# Altium PCB DIO_RJ45_DIOT.PCBDOC (part 4 of 6)
Units mil, origin at the board's own origin, x right, y up, seen from the top; angles counter-clockwise.
Board outline 8758.72 x 3941.04 mil, 4 copper layers (TopLayer, MidLayer1, Internal Plane 1, BottomLayer), stack 46.562 mil thick; 318 components, 196 nets, 1276 pads, 687 vias.
Unrouted connection lines stored in the file: 2.
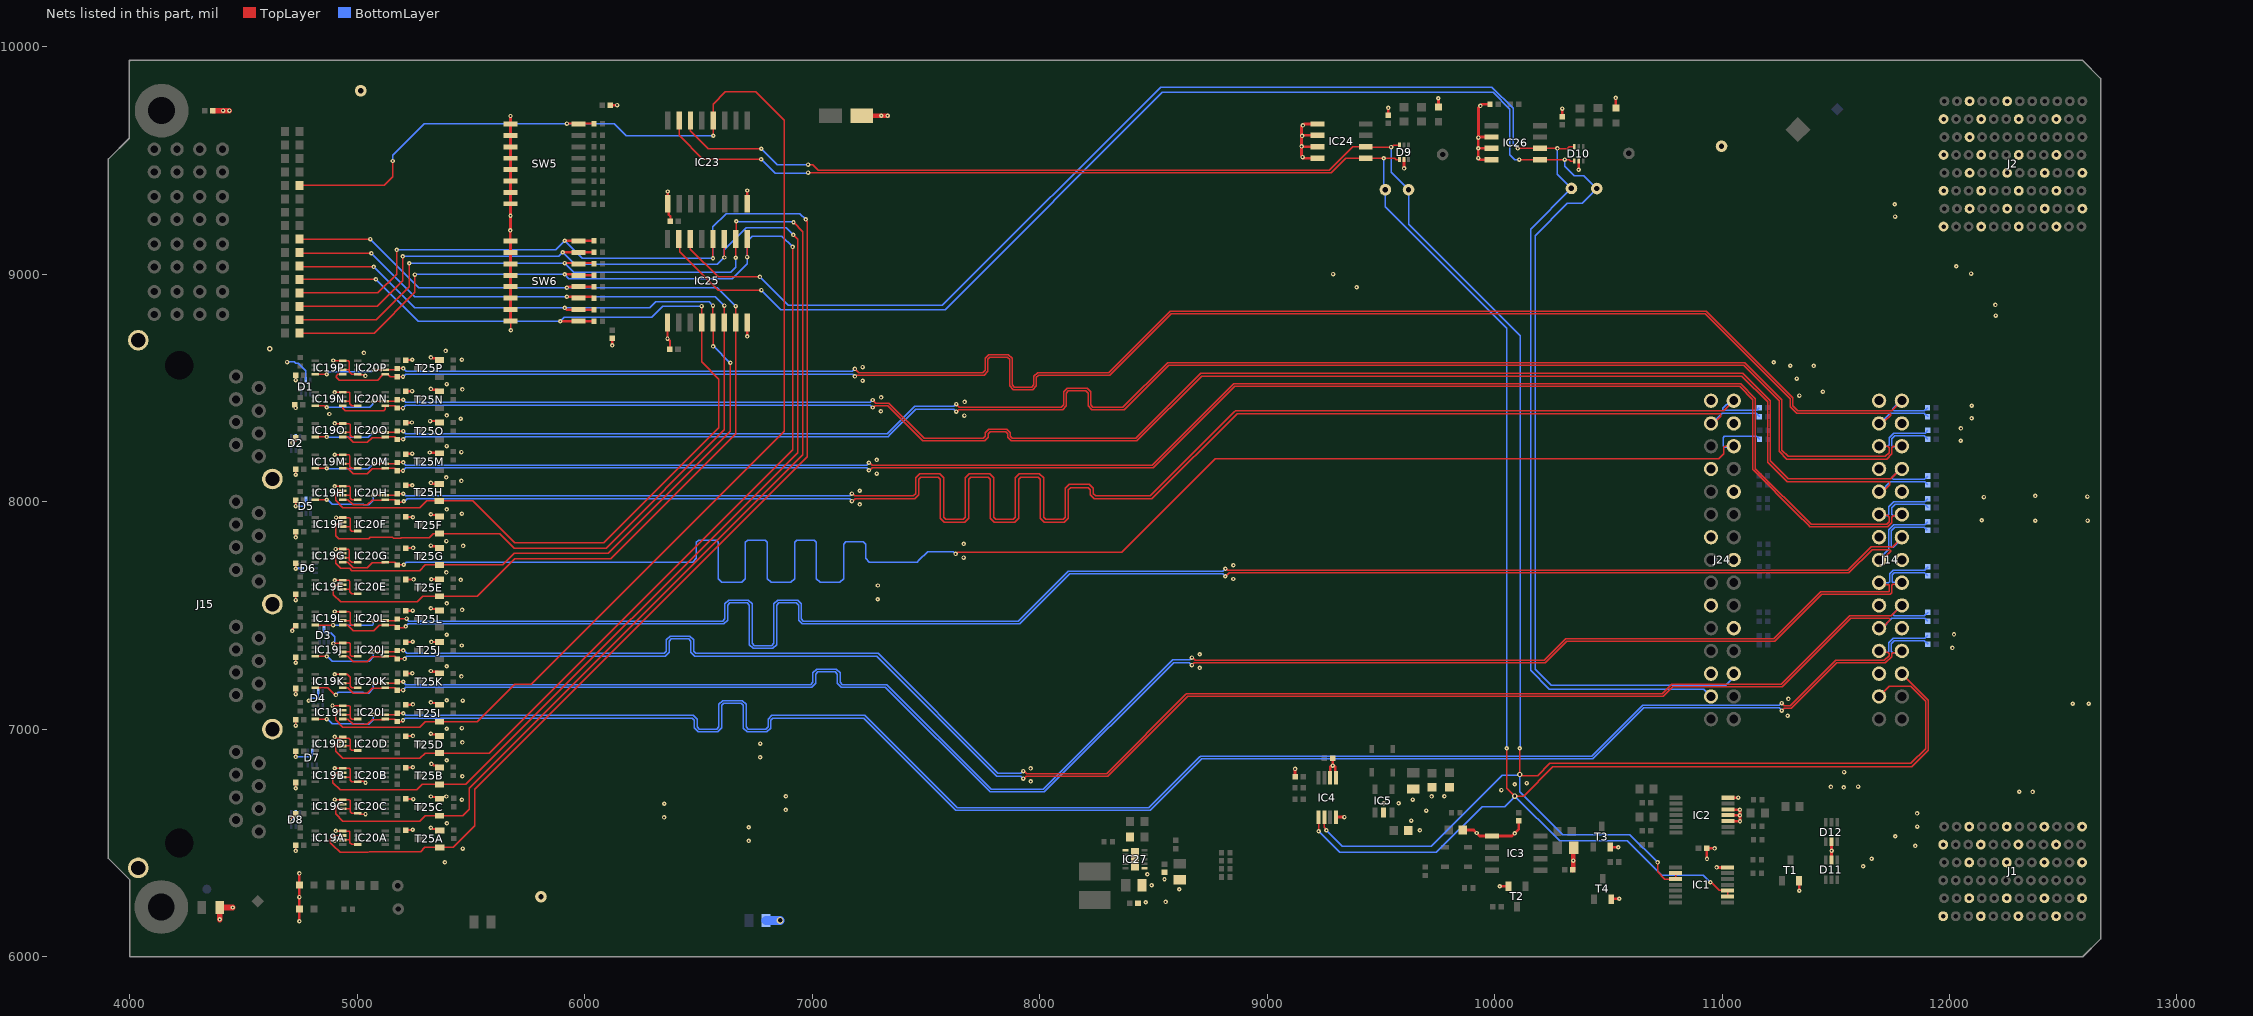
[diagram p5: the nets of this part, all layers, seen from the top]

## Via types
v1: diameter 19.68, hole 7.87, TopLayer to BottomLayer, tented both sides, 672 vias
v2: diameter 31.5, hole 19.68, TopLayer to BottomLayer, 10 vias
v3: diameter 23.62, hole 11.81, TopLayer to BottomLayer, tented both sides, 5 vias

## Nets (pads, with @x,y where several pads share a name; then routed paths per layer and width w, separated by ;. In a path a pad name is that pad's centre, name@x,y a point inside that pad or via, vN(x,y) a via of type N, cw(c..) or ccw(c..) an arc to the next point about the centre after c; other vN are vias at no path point) (continued)
DIR_CTRL7: IC19I.3 IC23.12 R95.2 R104.1 SW5.8 T25I.1 | length 6614.6
  TopLayer w6: R95.2@4746.06,9389.76 5119.09,9389.76 5156.5,9427.17 v1(5156.5,9497.05) ; IC19I.3@4937.15,7083.06 4921.47,7083.06 4905.13,7066.72 4905.13,7040.35 4937.1,7008.38 5275.28,7008.38 5299.13,7032.23 T25I.1@5362.05,7032.23 5527.31,7032.23 5691.93,7196.85 5765.75,7196.85 6876.97,8308.07 6876.97,9676.18 6751.97,9801.18 6619.09,9801.18 6565.35,9747.44 IC23.12@6565.35,9675.2 v1@6565.35,9607.87
  TopLayer w10: v1(5922.24,9661.42) 5971.26,9661.42 SW5.8@5973.42,9659.25 5975.59,9661.42 R104.1@6041.53,9661.42
  BottomLayer w6: v1(5156.5,9497.05) 5155.51,9498.03 5155.51,9522.64 5294.29,9661.42 5899.6,9661.42 v1(5922.24,9661.42) 6130.91,9661.42 6183.96,9608.37 v1(6565.85,9608.37)
DIR_CTRL8: IC19H.3 IC25.4 R106.1 R113.2 SW6.1 T25H.1 | length 4650.1
  TopLayer w6: R113.2@4746.06,8976.38 4747.05,8977.36 v1(5082.68,8977.36) ; IC19H.3@4937.15,8047.63 4921.47,8047.63 4905.13,8031.29 4905.13,8004.92 4937.1,7972.94 5275.28,7972.94 5305.29,8002.95 T25H.1@5360.24,8002.95 5507.87,8002.95 5691.93,7818.9 6084.82,7818.9 6590.55,8324.63 6590.55,8537.4 6514.37,8613.58 IC25.4@6514.37,8787.4 v1(6514.37,8859.25)
  TopLayer w10: v1(5892.72,8792.32) R106.1@6041.53,8792.32
  BottomLayer w6: v1(5082.68,8977.36) 5267.72,8792.32 v1(5892.72,8792.32) 5911.56,8811.17 6295.42,8811.17 6343.5,8859.25 v1(6514.37,8859.25)
DIR_CTRL9: IC19G.3 IC25.5 R108.1 R115.2 SW6.2 T25G.1 | length 4701.5
  TopLayer w6: R115.2@4759.84,9035.43 4759.84,9032.43 4760.78,9031.5 v1(5072.83,9031.5) ; IC19G.3@4937.15,7772.04 4921.47,7772.04 4905.13,7755.7 4905.13,7729.33 4928.26,7706.2 4967.03,7706.2 4976.38,7696.85 5274.78,7696.85 5299.13,7721.2 T25G.1@5362.05,7721.2 5639.51,7721.21 5689.96,7771.65 6104.39,7771.65 6640.75,8308.01 v1(6640.75,8610.24) ; v1(6564.37,8861.22) IC25.5@6564.37,8787.4 6564.96,8786.81 v1(6564.96,8682.09)
  TopLayer w10: R115.2@4746.06,9035.43 R115.2@4759.84,9035.43 ; v1(5912.4,8851.38) 5920.84,8842.94 R108.1@6041.53,8842.94
  BottomLayer w6: v1(5072.83,9031.5) 5252.95,8851.38 v1(5912.4,8851.38) 6286.42,8851.38 6313.13,8878.09 6547.5,8878.09 v1(6564.37,8861.22) ; v1(6564.96,8682.09) 6566.93,8682.09 6638.78,8610.24 v1(6640.75,8610.24)
DIR_CTRL10: IC19F.3 IC25.6 R110.1 R117.2 SW6.3 T25F.1 | length 4679.1
  TopLayer w6: R117.2@4746.06,9094.49 4749.02,9091.54 v1(5062.99,9091.54) ; IC19F.3@4937.15,7909.83 4921.47,7909.83 4905.13,7893.49 4905.13,7848.81 4918.31,7835.63 5050.38,7835.63 5058.74,7843.99 5155.27,7843.99 5160.19,7839.07 5192.06,7839.07 5194.23,7841.24 5194.32,7841.15 5316.64,7841.15 5334.49,7859 T25F.1@5362.05,7859 5627.22,7859 5690.95,7795.28 6094.6,7795.28 6614.17,8314.84 IC25.6@6614.17,8779.53 ; IC25.6@6614.37,8787.4 v1(6614.37,8861.22)
  TopLayer w10: v1(5922.24,8900.59) 6034.5,8900.59 R110.1@6041.53,8893.56
  BottomLayer w6: v1(5062.99,9091.54) 5253.94,8900.59 v1(5922.24,8900.59) 6575,8900.59 v1(6614.37,8861.22)
DIR_CTRL11: IC19E.3 IC25.7 R112.1 R119.2 SW6.4 T25E.1 | length 4875.9
  TopLayer w6: R119.2@4746.06,9153.54 v1(5058.07,9153.54) ; IC19E.3@4937.15,7633.86 4911.48,7633.86 4895.14,7617.52 4895.14,7591.15 4927.11,7559.17 5265.3,7559.17 5289.15,7583.02 T25E.1@5352.06,7583.02 ; T25E.1@5362.05,7583.41 5527.31,7583.41 5691.93,7748.03 6114.17,7748.03 6664.37,8298.23 IC25.7@6664.37,8787.4 v1(6664.37,8859.25)
  TopLayer w10: v1(5922.24,8939.96) 5926.46,8944.18 R112.1@6041.53,8944.18
  BottomLayer w6: v1(5058.07,9153.54) 5271.65,8939.96 v1(5922.24,8939.96) 6583.66,8939.96 v1(6664.37,8859.25)
DIR_CTRL12: IC19D.3 IC25.9 R105.2 R114.1 SW6.5 T25D.1 | length 6236.2
  TopLayer w6: R105.2@4754.92,8740.16 5074.8,8740.16 5253.94,8919.29 v1(5253.94,8998.03) ; IC19D.3@4937.15,6945.27 4921.47,6945.27 4905.13,6928.92 4905.13,6902.56 4937.1,6870.58 5275.28,6870.58 5299.13,6894.43 T25D.1@5362.05,6894.43 5581.62,6894.43 6914.37,8227.19 v1(6914.37,9119.09) ; v1(6714.37,9074.8) IC25.9@6714.37,9153.54
  TopLayer w10: R105.2@4746.06,8740.16 R105.2@4754.92,8740.16 ; v1(5912.4,8999.02) 5969.52,8999.02 SW6.5@5973.73,8994.8 ; R114.1@6041.53,8994.8 SW6.5@5973.73,8994.8 ; SW6.5@5973.73,8994.8 SW6.5@5973.42,8994.49 SW6.5@5973.73,8994.8
  BottomLayer w6: v1(5253.94,8998.03) 5254.43,8998.52 5911.91,8998.52 v1(5912.4,8999.02) 5931.1,8980.32 6649.61,8980.32 6714.37,9045.08 v1(6714.37,9074.8) 6714.37,9143.5 6737.88,9167.01 6866.45,9167.01 v1(6914.37,9119.09)
DIR_CTRL13: IC19C.3 IC25.10 R107.2 R116.1 SW6.6 T25C.1 | length 6586.5
  TopLayer w6: R107.2@4746.06,8799.21 5084.65,8799.21 5229.33,8943.9 v1(5229.33,9047.24) ; IC19C.3@4937.15,6669.68 4921.47,6669.68 4905.13,6653.33 4905.13,6626.97 4937.1,6594.99 5275.28,6594.99 5299.13,6618.84 T25C.1@5362.05,6618.84 5464.32,6618.84 5493.11,6647.64 5493.11,6739.17 6959.65,8205.71 6959.65,9186.02 v1(6918.31,9227.36) ; v1(6664.37,9071.85) IC25.10@6664.37,9153.54 6666.65,9155.82 v1(6666.65,9231.71)
  TopLayer w10: v1(5912.4,9048.23) 6038.72,9048.23 R116.1@6041.53,9045.42
  BottomLayer w6: v1(5229.33,9047.24) 5229.82,9047.74 5911.91,9047.74 v1(5912.4,9048.23) 5952.76,9007.87 6641.73,9007.87 6664.37,9030.51 v1(6664.37,9071.85) ; v1@6667.32,9233.27 6671.05,9229.54 6916.13,9229.54 v1(6918.31,9227.36)
DIR_CTRL14: IC19B.3 IC25.11 R109.2 R118.1 SW6.7 T25B.1 | length 6384.8
  TopLayer w6: R109.2@4746.06,8858.27 5088.58,8858.27 5200.79,8970.47 v1(5200.79,9077.76) ; IC19B.3@4937.15,6807.09 4909.52,6807.09 4893.17,6790.74 4893.17,6764.38 4925.58,6731.97 5262.9,6731.97 5287.18,6756.25 T25B.1@5362.05,6756.25 ; T25B.1@5362.05,6756.64 5477.23,6756.64 6936.02,8215.44 6936.02,9153.54 v1(6917.32,9172.24) ; v1(6614.37,9072.83) IC25.11@6614.37,9153.54
  TopLayer w10: v1(5903.96,9096.03) R118.1@6041.53,9096.03
  BottomLayer w6: v1(5200.79,9077.76) 5885.69,9077.76 v1(5903.96,9096.03) 5957.68,9042.32 6583.86,9042.32 v1(6614.37,9072.83) 6614.37,9107.48 6709.65,9202.76 6886.81,9202.76 v1(6917.32,9172.24)
DIR_CTRL15: IC19A.3 IC25.12 R111.2 R120.1 SW6.8 T25A.1 | length 6852.2
  TopLayer w6: R111.2@4746.06,8917.32 5091.53,8917.32 5174.21,9000 v1(5174.21,9106.3) ; IC19A.3@4937.15,6531.88 4898.69,6531.88 4882.73,6515.92 4882.73,6500.31 4893.77,6489.28 4925.85,6457.2 5049.9,6457.2 5053.82,6461.12 5279.21,6461.12 5297.42,6479.33 5422.24,6479.33 5517.72,6574.8 5517.72,6734.25 6979.33,8195.87 6979.33,9229.8 6972.44,9236.69 v1(6972.44,9240.16) ; v1(6564.37,9069.88) IC25.12@6564.37,9153.54
  TopLayer w10: v1(5912.4,9146.65) R120.1@6041.53,9146.65
  BottomLayer w6: v1(5174.21,9106.3) 5872.05,9106.3 v1(5912.4,9146.65) 5989.17,9069.88 v1(6564.37,9069.88) 6564.37,9207.09 6623.03,9265.75 6946.85,9265.75 v1(6972.44,9240.16)
EEM1_I2C.SCL: B2.1 D9.6 IC1.9 IC1.10 IC4.2 IC23.14 IC24.6 J14.27 | length 10610.6
  TopLayer w6: IC23.14@6465.35,9675.2 6465.35,9629.09 6543.26,9551.18 v1(6776.97,9551.18) ; v1(6982.28,9481.3) 7002.95,9481.3 7027.39,9456.87 9274.46,9456.87 9377.24,9559.65 IC24.6@9434.06,9559.65 9435.63,9558.07 v1(9545.28,9558.07) 9548.98,9558.07 9557.44,9566.54 D9.6@9582.68,9566.54 ; IC4.2@9251.97,6612.2 9251.97,6567.68 9260.83,6558.82 v1(9260.83,6555.12) ; v1(10111.22,6915.35) 10111.42,6915.16 v3(10111.42,6800) 10116.14,6795.28 10188.98,6795.28 10242.13,6848.43 11830.71,6848.43 11896.48,6914.2 11896.48,7121.24 11828.74,7188.98 11736.26,7188.98 J14.27@11690.65,7143.37 ; v1(10716.54,6413.39) 10716.54,6372.05 10748.03,6340.55 IC1.10@10796.26,6340.55 IC1.9@10796.26,6366.14
  BottomLayer w6: v1@6775.59,9551.18 v1(6776.97,9551.18) 6846.86,9481.3 v1(6982.28,9481.3) ; v1(9260.83,6555.12) 9330.71,6485.24 9722.44,6485.24 10034.84,6797.64 v3@10109.06,6797.64 ; v1(9545.28,9558.07) 9545.28,9447.77 B2.1@9621.98,9371.06 9621.98,9219.55 10112.32,8729.21 v1@10112.32,6915.35 ; v3@10112.32,6800.9 v3(10111.42,6800) 10111.42,6723.23 10299.14,6535.51 10594.41,6535.51 v1(10716.54,6413.39)
EEM1_I2C.SDA: B6.1 D9.1 IC1.2 IC1.3 IC4.1 IC23.15 IC24.5 J14.26 | length 10866.9
  TopLayer w6: IC23.15@6415.35,9675.2 6415.35,9609.25 6519.5,9505.11 v1(6775.81,9505.11) ; v1(6982.28,9445.87) 9281.5,9445.87 9345.28,9509.65 IC24.5@9434.06,9509.65 9434.84,9508.86 v1(9512.8,9508.86) 9561.02,9508.86 9566.93,9502.95 9581.3,9502.95 D9.1@9582.68,9504.33 ; v1(9226.38,6550.2) IC4.1@9226.38,6612.2 ; v1(10054.13,6915.35) 10054.13,6739.62 v3(10088.55,6705.2) 10127.45,6705.2 10255.3,6833.06 11833.06,6833.06 11907.48,6907.48 11907.48,7126.54 J14.26@11790.65,7243.37 ; v1(10948.82,6326.77) 10952.52,6326.77 10988.38,6290.92 11023.06,6290.92 IC1.3@11024.61,6289.37 IC1.2@11024.61,6263.78
  BottomLayer w6: v1@6773.62,9507.87 6838.02,9443.48 6979.9,9443.48 v1(6982.28,9445.87) ; v1(9226.38,6550.2) 9319.07,6457.5 9744.71,6457.5 9945.67,6658.46 10044.29,6658.46 10088.55,6702.72 v3(10088.55,6705.2) 10285.88,6507.87 10583.66,6507.87 10734.25,6357.28 10874.01,6357.28 10918.31,6357.28 v1(10948.82,6326.77) ; v1(9512.8,9508.86) 9512.8,9378.51 B6.1@9520.24,9371.06 9520.24,9295.7 10054.58,8761.37 v1@10054.58,6914.27
EEM2_I2C.SCL: B4.1 D10.6 IC25.14 IC26.6 J24.27 | length 7874.1
  TopLayer w6: IC25.14@6464.37,9153.54 6465.3,9152.62 6465.3,9108.69 6586.78,8987.2 v1(6770.67,8987.2) ; v1(10102.36,9552.17) IC26.6@10199.7,9552.17 ; IC26.6@10199.11,9552.76 IC26.6@10199.7,9552.17 ; D10.6@10350.39,9559.65 10328.35,9559.65 10318.9,9550.2 10278.54,9550.2 v1(10276.57,9552.17) IC26.6@10199.7,9552.17
  BottomLayer w6: v1(6770.67,8987.2) 6895.67,8862.2 7024.61,8862.2 7573.14,8862.2 8532.92,9821.98 9988.06,9821.98 10081.79,9728.25 10081.79,9572.74 v1(10102.36,9552.17) ; v1(10276.57,9552.17) 10275.59,9551.18 10275.59,9438.98 B4.1@10338.09,9376.48 10158.46,9196.85 10158.46,7257.87 10241.14,7175.2 10919.81,7175.2 J24.27@10951.68,7143.33
EEM2_I2C.SDA: B3.1 D10.1 IC25.15 IC26.5 J24.26 | length 8140.3
  TopLayer w6: IC25.15@6414.37,9153.54 6418.31,9149.61 6418.31,9098.43 6587.29,8929.44 v1(6777.01,8929.44) ; v1(10108.51,9503.2) IC26.5@10199.55,9503.2 ; IC26.5@10199.11,9502.76 IC26.5@10199.55,9503.2 ; D10.1@10350.39,9497.44 10348.03,9495.08 10334.65,9495.08 10327.67,9502.05 10309.98,9502.05 v1(10308.83,9503.2) IC26.5@10199.55,9503.2
  BottomLayer w6: v1@6777.56,8929.13 6777.56,8928.89 6862.68,8843.77 7071.14,8843.77 7584.91,8843.77 8539.37,9798.23 9994.09,9798.23 10067.91,9724.41 10067.91,9523.62 10088.34,9503.2 v1(10108.51,9503.2) ; v1(10308.83,9503.2) 10309.06,9502.97 10309.06,9473.43 10349.41,9433.07 10392.72,9433.07 B3.1@10449.8,9375.98 10384.84,9311.02 10319.88,9311.02 10178.15,9169.29 10178.15,7263.78 10249.02,7192.91 11016.43,7192.91 11051.68,7228.16 J24.26@11051.68,7243.33
GND: B5.1 B7.1 B9.1 C1.2 C3.1 C4.1 C5.1 C7.1 C8.1 C9.1 C10.1 C23.1 C24.1 C25.1 C46A.1 C46B.1 C46C.1 C46D.1 C46E.1 C46F.1 C46G.1 C46H.1 C46I.1 C46J.1 C46K.1 C46L.1 C46M.1 C46N.1 C46O.1 C46P.1 C47A.1 C47B.1 C47C.1 C47D.1 C47E.1 C47F.1 C47G.1 C47H.1 C47I.1 C47J.1 C47K.1 C47L.1 C47M.1 C47N.1 C47O.1 C47P.1 C57.1 C58.1 C60.1 C61.1 C62.2 C63.1 C64.1 C65.1 C66.1 C67.1 C68.1 D1.2 D2.2 D3.2 D4.2 D5.2 D6.2 D7.2 D8.2 D9.2 D10.2 D11.2 D12.2 IC1.7 IC2.3 IC2.4 IC2.5 IC2.7 IC3.1 IC4.4 IC4.5 IC4.6 IC5.2 IC19A.2 IC19A.4 IC19B.2 IC19B.4 IC19C.2 IC19C.4 IC19D.2 IC19D.4 IC19E.2 IC19E.4 IC19F.2 IC19F.4 IC19G.2 IC19G.4 IC19H.2 IC19H.4 IC19I.2 IC19I.4 IC19J.2 IC19J.4 IC19K.2 IC19K.4 IC19L.2 IC19L.4 IC19M.2 IC19M.4 IC19N.2 IC19N.4 IC19O.2 IC19O.4 IC19P.2 IC19P.4 IC20A.4 IC20B.4 IC20C.4 IC20D.4 IC20E.4 IC20F.4 IC20G.4 IC20H.4 IC20I.4 IC20J.4 IC20K.4 IC20L.4 IC20M.4 IC20N.4 IC20O.4 IC20P.4 IC23.1 IC23.8 IC24.1 IC24.2 IC24.3 IC24.4 IC25.1 IC25.8 IC26.2 IC26.3 IC26.4 IC27.1 IC27.6 IC27.11 J1.A2 J1.A4 J1.A6 J1.C1 J1.C5 J1.D2 J1.D4 J1.D6 J1.F1 J1.F5 J1.G2 J1.G4 J1.G6 J1.I1 J1.I5 J1.J2 J1.J4 J1.J6 J1.L1 J1.L5 J2.A2 J2.A4 J2.C1 J2.C3 J2.C5 J2.C7 J2.D2 J2.D4 J2.F1 J2.F3 J2.F5 J2.F7 J2.G2 J2.G4 J2.G8 J2.I1 J2.I3 J2.I5 J2.I7 J2.J2 J2.J4 J2.J6 J2.J8 J2.L1 J2.L3 J2.L5 J2.L7 J14.1 J14.4 J14.7 J14.10 J14.13 J14.16 J14.19 J14.22 J14.25 J15.SH J24.1 J24.4 J24.7 J24.10 J24.13 J24.16 J24.19 J24.22 J24.25 LD5.1 LD6.1 LD7.1 LD8.1 R8.2 R62.2 R68.2 R71.1 R122.1 SW5.9 SW5.10 SW5.11 SW5.12 SW5.13 SW5.14 SW5.15 SW5.16 SW6.9 SW6.10 SW6.11 SW6.12 SW6.13 SW6.14 SW6.15 SW6.16 T1.2 T2.2 T3.2 T4.2 T25A.2 T25B.2 T25C.2 T25D.2 T25E.2 T25F.2 T25G.2 T25H.2 T25I.2 T25J.2 T25K.2 T25L.2 T25M.2 T25N.2 T25O.2 T25P.2 | length 9559.1
  TopLayer w6: v1(4704.72,6601.99) 4724.41,6621.68 4729.41,6621.68 C47C.1@4729.41,6626.99 ; v1(4714.56,7431.09) 4714.56,7438.91 C47L.1@4729.41,7453.76 ; v1(4714.56,8257.86) 4721.89,8257.86 4729.41,8265.38 C47O.1@4729.41,8280.54 ; C47A.1@4729.41,6489.2 4729.41,6464.91 v1(4730.13,6464.2) ; C47B.1@4729.41,6764.79 4729.41,6740.5 v1(4730.13,6739.79) ; C47D.1@4729.41,6902.58 4729.41,6878.3 v1(4730.13,6877.58) ; C47I.1@4729.41,7040.38 4729.41,7016.09 v1(4730.13,7015.38) ; C47K.1@4729.41,7178.17 4729.77,7177.81 v1(4729.77,7153.53) ; C47J.1@4729.41,7315.97 4729.41,7291.69 v1(4730.13,7290.97) ; C47E.1@4729.41,7591.56 4729.41,7567.28 v1(4730.13,7566.56) ; C47G.1@4729.41,7729.35 4729.41,7705.07 v1(4730.13,7704.35) ; C47F.1@4729.41,7867.15 4729.41,7842.87 v1(4730.13,7842.15) ; C47H.1@4729.41,8004.94 4729.41,7980.66 v1(4730.13,7979.94) ; C47M.1@4729.41,8142.74 4729.41,8118.46 v1(4730.13,8117.74) ; v1(4729.41,8411.6) C47N.1@4729.41,8418.33 ; C47P.1@4729.41,8556.13 4729.41,8531.84 4730.13,8532.56 v1(4730.13,8533.92) ; v1(4891.73,7103.22) 4892.2,7102.75 IC19I.4@4937.15,7102.75 4965.9,7102.75 4969.42,7099.23 4969.42,7049.93 4975.65,7043.69 IC20I.4@5002.1,7043.69 ; v1(4895,8620) 4935.65,8620 IC19P.4@4937.15,8618.5 4961.19,8618.5 4964.71,8614.98 4964.71,8579.13 ; v1(4895.67,7375.98) 4896.85,7377.16 4935.97,7377.16 IC19J.4@4937.15,7378.34 4966.09,7378.34 4969.6,7374.82 4969.6,7325.34 4975.65,7319.28 IC20J.4@5002.1,7319.28 ; v1(4901.57,6508.12) 4905.65,6512.2 IC19A.2@4937.15,6512.2 4968.06,6512.2 ; v1(4901.57,6689.83) 4902.05,6689.36 IC19C.4@4937.15,6689.36 4965.59,6689.36 4969.11,6685.85 4969.11,6636.85 4975.65,6630.31 IC20C.4@5002.1,6630.31 5004.79,6632.99 5011.63,6626.15 v1(5036.81,6626.15) ; v1(4901.57,6827.63) 4902.05,6827.16 4965.86,6827.16 4969.37,6823.64 4969.37,6787.79 ; v1(4901.57,6965.43) 4906.83,6960.17 4962.88,6960.17 4969.49,6953.57 4969.49,6925.58 ; v1(4901.57,7241.02) 4902.05,7240.54 IC19K.4@4937.15,7240.54 4957.05,7240.54 4968.92,7228.67 4968.92,7201.17 ; v1(4901.57,7516.61) 4902.05,7516.13 IC19L.4@4937.15,7516.13 4965.88,7516.13 4969.39,7512.62 4969.39,7476.76 ; v1(4901.57,8205.58) 4902.05,8205.11 IC19M.4@4937.15,8205.11 4964.61,8205.11 4968.13,8201.6 4968.13,8174.16 4968.19,8174.09 4968.19,8153.51 4975.65,8146.06 IC20M.4@5002.1,8146.06 ; v1(4901.57,8343.38) 4902.05,8342.91 4965.38,8342.91 4968.89,8339.39 4968.89,8305.2 ; v1(4901.57,8480.19) 4901.83,8480.44 4936.89,8480.44 IC19N.4@4937.15,8480.7 4964.61,8480.7 4968.13,8477.19 4968.13,8449.75 4968.15,8429.15 4975.65,8421.65 IC20N.4@5002.1,8421.65 ; v1(4901.57,7653.93) IC19E.4@4937.15,7653.93 4964.61,7653.93 4968.13,7650.42 4968.13,7602.4 4975.65,7594.87 IC20E.4@5002.1,7594.87 IC20E.4@4999.99,7592.76 ; v1(4902.05,8067.32) IC19H.4@4937.15,8067.32 4966.74,8067.32 4970.26,8063.8 4970.26,8026.57 ; v1(4905,7791) 4905.72,7791.72 IC19G.4@4937.15,7791.72 4938.67,7790.2 4962.42,7790.2 4965.94,7786.69 4965.94,7752.35 ; v1(4906,6552.04) 4906.47,6551.57 IC19A.4@4937.15,6551.57 4964.61,6551.57 4968.13,6548.05 4968.13,6500.04 4975.65,6492.51 IC20A.4@5002.1,6492.51 ; v1(4907.48,7929.52) IC19F.4@4937.15,7929.52 4966.05,7929.52 4969.57,7926.01 4969.57,7890.15 ; IC19C.2@4937.15,6649.99 4968.96,6649.99 ; IC19B.2@4937.15,6787.79 4969.37,6787.79 ; IC19D.2@4937.15,6925.58 4969.49,6925.58 ; IC19I.2@4937.15,7063.38 4968.55,7063.38 ; IC19K.2@4937.15,7201.17 4968.92,7201.17 ; IC19J.2@4937.15,7338.97 4969.49,7338.97 ; IC19L.2@4937.15,7476.76 4969.39,7476.76 ; IC19E.2@4937.15,7614.56 4967.15,7614.56 ; IC19H.2@4937.15,8027.94 4938.53,8026.57 4970.26,8026.57 ; IC19M.2@4937.15,8165.74 4967.35,8165.74 4968.13,8166.51 ; IC19O.2@4937.15,8303.54 4969.12,8303.54 4969.12,8290.38 4975.65,8283.85 IC20O.4@5002.1,8283.85 ; IC19N.2@4937.15,8441.33 4967.31,8441.33 4968.13,8442.14 ; IC19P.2@4937.15,8579.13 4964.71,8579.13 ; IC19G.2@4941.93,7757.13 4937.15,7752.35 4965.94,7752.35 ; IC19F.2@4941.93,7894.93 IC19F.2@4937.15,7890.15 4969.57,7890.15 ; 4968.73,7889.31 4969.57,7890.15 ; 4969.49,7476.76 4969.39,7476.76 ; IC20D.4@5002.1,6905.9 4975.65,6905.9 4969.49,6912.06 4969.49,6925.58 ; IC20K.4@5002.1,7181.49 4975.65,7181.49 4968.92,7188.22 4968.92,7201.17 ; IC20L.4@5002.1,7457.08 4975.65,7457.08 4969.39,7463.34 4969.39,7476.76 ; IC20G.4@5002.1,7732.67 4975.65,7732.67 4965.94,7742.38 4965.94,7752.35 ; IC20F.4@5002.1,7870.46 4975.65,7870.46 4969.57,7876.55 4969.57,7890.15 ; IC20H.4@5002.1,8008.26 4975.65,8008.26 4970.26,8013.66 4970.26,8026.57 ; v1(5036.42,8552.04) 5033.82,8552.04 5027.83,8558.03 5003.51,8558.03 IC20P.4@5002.1,8559.44 4975.99,8559.44 4964.99,8570.44 4964.99,8579.13 4964.71,8579.13 ; v1(5036.81,6763.95) 5029.97,6770.79 5004.79,6770.79 IC20B.4@5002.1,6768.1 4975.65,6768.1 4969.37,6774.39 4969.37,6787.79 ; SW6.16@5674.21,8794.49 5674.21,8754.92 v1(5676.18,8752.95)
  TopLayer w10: C46A.1@5213.84,6555.04 5214.86,6556.06 5243.07,6556.06 v1(5244.09,6557.09) ; C46C.1@5213.84,6692.83 5214.29,6692.38 5246.59,6692.38 v1(5247.05,6691.93) ; C46B.1@5213.84,6830.63 5214.37,6831.16 5244.55,6831.16 v1(5245.08,6831.69) ; C46D.1@5213.84,6968.43 5214.37,6968.96 5244.55,6968.96 v1(5245.08,6969.49) ; C46I.1@5213.84,7106.22 5214.87,7107.24 5244.06,7107.24 v1(5245.08,7108.27) ; C46K.1@5213.84,7244.02 5214.37,7244.55 5242.58,7244.55 v1(5243.11,7245.08) ; C46J.1@5213.84,7381.81 5214.86,7382.83 5243.07,7382.83 v1(5244.09,7383.86) ; C46L.1@5213.84,7519.61 5214.37,7520.14 5243.56,7520.14 v1(5244.09,7520.67) ; C46E.1@5213.84,7657.4 5213.88,7657.44 5247.99,7657.44 v1(5248.03,7657.48) ; C46G.1@5213.84,7795.2 5214.37,7795.73 5245.53,7795.73 v1(5246.06,7796.26) ; C46F.1@5213.84,7932.99 5214.79,7932.05 5244.13,7932.05 v1(5245.08,7931.1) ; C46H.1@5213.84,8070.79 5214.37,8071.32 5241.59,8071.32 v1(5242.13,8071.85) ; C46M.1@5213.84,8208.58 5214.87,8209.61 5241.1,8209.61 v1(5242.13,8210.63) ; C46O.1@5213.84,8346.38 5214.37,8346.91 5240.61,8346.91 v1(5241.14,8347.44) ; C46N.1@5213.84,8484.17 5214.59,8484.92 5240.88,8484.92 v1(5241.63,8485.67) ; C46P.1@5213.84,8621.97 5214.37,8622.5 5241.59,8622.5 v1(5242.13,8623.03) ; v1(5318.9,8215.55) 5320.37,8214.07 5360.73,8214.07 T25M.2@5362.21,8212.6 ; v1(5320.68,8353.96) T25O.2@5358.21,8353.96 ; v1(5324.13,6566.04) 5326.75,6566.04 5332.34,6560.45 5356.87,6560.45 T25A.2@5363.19,6554.13 ; v1(5324.13,6703.32) 5326.75,6703.32 5328.63,6701.44 5352.44,6701.44 T25C.2@5359.98,6693.9 ; v1(5324.13,6979.43) 5326.75,6979.43 5330.04,6976.13 5348.53,6976.13 T25D.2@5357.14,6967.52 ; v1(5324.13,7117.22) 5326.75,7117.22 5330.04,7113.93 5351.46,7113.93 T25I.2@5358.1,7107.28 ; v1(5324.13,7255.02) 5326.75,7255.02 5330.04,7251.72 5354.47,7251.72 T25K.2@5359.15,7247.05 ; v1(5324.13,7530.61) 5326.75,7530.61 5330.04,7527.31 5350.47,7527.31 T25L.2@5358.1,7519.69 ; v1(5324.13,7806.2) 5326.75,7806.2 5330.04,7802.9 5348.98,7802.9 T25G.2@5357.59,7794.29 ; v1(5324.13,7943.99) 5326.75,7943.99 5330.04,7940.7 5352.59,7940.7 T25F.2@5357.27,7936.02 ; v1(5324.13,8081.79) 5326.75,8081.79 5330.04,8078.49 5356.53,8078.49 T25H.2@5359.24,8075.79 ; v1(5324.13,8495.17) 5326.75,8495.17 5330.04,8491.88 5355.69,8491.88 T25N.2@5360.37,8487.2 ; v1(5324.53,8633.37) 5327.15,8633.37 5330.44,8630.08 5347.24,8630.08 T25P.2@5357.23,8620.08 ; v1(5326.54,6846.73) 5329.16,6846.73 5336.66,6839.24 5354.25,6839.24 T25B.2@5362.05,6831.44 ; v1(5326.54,7382.62) T25J.2@5362.05,7382.62 ; v1(5326.54,7658.21) T25E.2@5362.05,7658.21 ; IC25.1@6364.37,8787.4 v1(6364.37,8716.48) 6375,8705.85 C63.1@6375,8669.29 ; v1@6365.16,9363.19 v1(6365.35,9362.99) ; IC23.1@6365.35,9309.05 6369.57,9304.83 6369.57,9260.88 6377.81,9252.65 6377.81,9232.14 C57.1@6376.97,9231.3
  TopLayer w12: v1(4746.06,6154.53) LD5.1@4746.06,6208.66 v1(4746.06,6261.32) LD6.1@4746.06,6313.98 v1(4746.06,6365.16) ; SW6.16@5674.21,8794.49 SW6.15@5674.21,8844.49 SW6.14@5674.21,8894.49 SW6.13@5674.21,8944.49 SW6.12@5674.21,8994.49 SW6.11@5674.21,9044.49 SW6.10@5674.21,9094.49 SW6.9@5674.21,9144.49 5673.23,9145.47 v1(5673.23,9191.93) 5673.72,9192.42 5673.72,9255.41 v1(5674.21,9255.91) SW5.16@5674.21,9309.25 SW5.15@5674.21,9359.25 SW5.14@5674.21,9409.25 SW5.13@5674.21,9459.25 SW5.12@5674.21,9509.25 SW5.11@5674.21,9559.25 SW5.10@5674.21,9609.25 v1(5674.21,9694.88) ; C61.1@6113.19,9741.14 6114.17,9742.13 6141.73,9742.13 v1(6142.72,9743.11) ; v1(6121.06,8686.02) C60.1@6121.06,8718.5 ; IC23.1@6365.35,9309.05 v1(6365.35,9362.99) ; IC25.8@6714.37,8787.4 6714.66,8787.11 6714.66,8726.28 v1(6714.96,8725.98) ; v1@6714.57,9368.11 v1(6715.35,9367.32) IC23.8@6715.35,9309.05 ; C3.1@9123.03,6790.35 v1(9123.03,6824.8) ; IC24.4@9221.46,9509.65 9160.63,9509.65 9151.57,9518.7 v1(9151.57,9561.02) ; IC24.3@9221.46,9559.65 9152.95,9559.65 v1(9151.57,9561.02) ; IC24.2@9221.46,9609.65 9156.89,9609.65 v1@9151.57,9604.33 ; IC24.1@9221.46,9659.65 9163.58,9659.65 9151.57,9647.64 v1@9151.57,9604.33 ; IC4.6@9277.56,6785.43 9277.84,6785.72 9277.84,6832.96 v1@9288.89,6844 ; R71.1@9288.89,6872.46 v1@9288.89,6844 ; IC4.4@9303.15,6612.2 9304.02,6613.07 v1(9340.12,6613.07) ; IC4.5@9303.15,6785.43 9300.29,6788.29 9300.29,6832.6 v1@9288.89,6844 ; v1(9532.48,9730.32) 9532.97,9729.82 9532.97,9698.33 C58.1@9533.46,9697.83 ; v1(9602.36,9464.57) D9.2@9602.36,9504.33 ; v1(9752.95,9773.01) 9753.44,9772.52 9753.44,9734.74 LD8.1@9753.94,9734.25 ; C9.1@9861.2,6556.07 9908.44,6556.07 9934.78,6529.72 IC3.1@9989.17,6529.72 10076.97,6529.72 v1(10088.58,6541.34) 10106.33,6559.08 C8.1@10106.33,6597.34 ; v1@9928.15,9595.47 v1@9928.15,9552.66 ; v1(9929.38,9600.18) 9929.38,9730.56 9945.87,9747.05 R68.2@9979.53,9747.05 ; v1@9935.43,9602.76 IC26.2@9986.51,9602.76 ; IC26.4@9986.51,9502.76 9935.24,9502.76 v1(9928.15,9509.84) v1@9928.15,9552.66 ; IC26.3@9986.51,9552.76 v1(9928.25,9552.76) v1@9928.15,9552.66 ; v1(10022.64,6309.06) T2.2@10062.01,6309.06 ; v1(10297.71,9727.77) 10297.97,9727.51 10297.97,9692.19 C64.1@10298.23,9691.93 ; v1(10369.79,9458.62) 10369.98,9458.81 10369.98,9497.35 D10.2@10370.08,9497.44 ; T3.2@10508.86,6481.3 10509.54,6480.62 v1(10543.51,6480.62) ; T4.2@10512.8,6251.97 10514.95,6254.12 v1(10548.65,6254.12) ; v1(10532.48,9774.61) 10532.97,9774.11 10532.97,9729.82 LD7.1@10533.46,9729.33 ; C5.1@10930.12,6476.38 10933.07,6473.43 10933.07,6430.12 v1(10934.06,6429.13) ; C5.1@10930.61,6475.89 10967.03,6475.89 v1(10967.52,6475.39) ; v1(10976.38,6391.73) IC1.7@11024.61,6391.73 ; IC2.3@11026.58,6595.47 11027.21,6594.84 11078.48,6594.84 v1@11078.93,6594.4 ; IC2.4@11026.58,6621.06 v1(11078.74,6621.06) ; IC2.5@11026.58,6646.65 11027.56,6645.67 11077.76,6645.67 v1(11078.74,6644.69) v1(11078.74,6621.06) ; IC2.7@11026.58,6697.83 11027.07,6698.33 11071.36,6698.33 v1(11071.85,6698.82) ; v1(11079.11,6594.21) v1@11078.93,6594.4 ; T1.2@11338.58,6333.66 11339.57,6332.68 v1(11339.57,6289.37) ; D11.2@11481.3,6424.21 D12.2@11481.3,6503.94 ; v1(9151.57,9561.02) v1@9151.57,9604.33 ; v1(11078.74,6621.06) 11078.93,6620.88 v1@11078.93,6594.4
  TopLayer w20: C62.2@7218.5,9695.87 v1(7331.69,9695.87) ; C10.1@10343.5,6379.92 10345.47,6381.89 10345.47,6476.38 C7.1@10347.44,6478.35
  TopLayer w24: C1.2@4367.53,9718.5 v1@4438.54,9718.5
  TopLayer w25: v1@4395.67,6162.4 v1(4396.25,6162.98) R8.2@4396.25,6215.43 v1(4453.62,6215.43) v1@4453.74,6215.55
  BottomLayer w6: v1(4691.93,8613.19) 4692.71,8613.97 4723.31,8613.97 4729.32,8607.97 4740.46,8607.97 4773.62,8574.8 D1.2@4773.62,8535.04 ; v1(4704.72,6601.99) 4714.38,6601.99 4730.13,6617.74 D8.2@4730.13,6633.09 ; v1(4714.56,7431.09) v1@4714.56,7432.4 ; v1@4718.31,8257.86 4730.13,8269.67 D2.2@4730.13,8286.64 ; v1(4730.13,6877.58) 4795.89,6877.58 4802.17,6883.86 D7.2@4802.17,6904.13 ; v1(4730.13,7704.35) 4733,7707.23 D6.2@4754.52,7707.23 ; v1(4730.13,7979.94) 4765.38,7979.94 4775.59,7990.16 D5.2@4775.59,8010.43 ; v1(4787.54,7124.4) 4798.97,7135.83 4828.74,7135.83 D4.2@4828.74,7165.94 ; D3.2@4854.33,7442.52 4854.33,7425.81 4857.85,7422.3 4884.47,7422.3 4901.29,7405.49 4901.29,7385.3 4895.67,7379.69 v1(4895.67,7375.98) ; v1(5036.81,6626.15) v1@5039.37,6628.71 ; v1(5036.81,6763.95) v1@5038.95,6761.81
  BottomLayer w40: R62.2@6797.27,6158.81 v2(6859.45,6158.81)
  other v1: 8466.89,6238.18 8554.13,6240.16 8614.17,6295.28 8492.13,6312.99 8549.21,6339.57 8473.94,6361.58 11620.08,6396.65 5385.83,6414.41 10345.8,6421.42 11657.48,6430.12 11481.75,6464.53 5464.57,6474.45 11849.41,6486.22 6721.46,6507.87 11761.81,6528.54 9921.61,6542.9 9672.24,6555.12 6721.99,6568.05 11858.27,6571.26 5394.68,6585.63 9633.86,6597.44 6349.41,6611.22 11857.56,6629.11 9699.8,6641.73 6884.3,6644.55 6349.95,6671.39 9512.99,6673.36 9578.14,6673.62 5460.63,6689.02 9640.75,6689.96 5392.72,6703.32 9723.43,6703.74 6884.84,6704.72 9779.53,6704.72 12365.16,6723.43 12307.09,6724.41 10030.26,6731.4 11535.21,6743.3 11478.62,6745.32 11598.43,6747.05 10089.35,6757.24 10141.54,6762.36 7961.61,6769.69 5462.6,6792.32 11536.61,6810.76 7960.63,6826.77 9288.84,6839.01 5393.54,6862.94 6771.65,6875.98 6772.19,6936.16 5462.6,6941.24 5393.54,7000.73 5460.63,7003.98 11288.39,7058.07 12542.32,7111.22 12612.2,7110.72 5464.57,7125.04 5393.54,7126.81 11292.11,7132.15 5458.66,7231.34 8703.74,7268.7 5393.54,7276.32 8704.28,7328.87 12012.78,7356.6 5459.65,7367.17 5393.54,7414.12 12019.88,7416.11 5461.62,7523.66 5393.54,7551.91 7288.83,7570.73 7289.37,7630.91 5455.81,7655.66 8851.38,7659.45 5392.29,7688.46 8851.92,7719.62 7665.8,7753.8 5465.55,7805.16 7666.34,7813.98 5392.37,7826.34 12376.97,7915.35 12607.28,7916.34 12141.73,7917.32 5460.63,7945.91 5393.54,7965.3 7209.11,7987.07 12151.57,8019.69 12606.3,8021.65 12376.97,8024.61 7209.65,8047.24 5458.66,8090.59 5391.73,8106.3 7283.91,8122.9 7284.45,8183.07 5458.66,8217.56 5393.54,8244.09 12049.97,8267.45 12050.44,8321.38 5455.81,8364.32 12097.14,8365.88 7669.74,8377.82 5393.54,8378.69 4877.95,8384.88 7302.58,8397.25 12098.08,8421.38 7670.28,8437.99 7303.12,8457.42 11340.55,8466.03 11443.76,8482.33 5462.6,8493.15 5393.54,8516.48 7221.7,8530.87 11328.74,8540.83 7222.24,8591.05 11403.54,8595.95 11299.95,8597.26 11227.31,8612.37 5460.63,8623.07 5029.65,8653.37 5388.78,8662.26 12203.74,8817.69 12201.77,8864.38 9393.7,8941.93 9290.35,9000 12094.92,9002.14 12029.91,9033.93 11760.83,9252.95 11759.84,9307.09 9156.1,9514.17 9154.23,9606.99 9157.58,9653.64 7304.13,9695.87 4410.85,9718.5 4438.61,9718.57 9937.86,9739.35
  other v3: 4616.14,8671.26
LVDS0_N: IC19P.1 IC20P.5 J14.3 R65.2 R132P.2 | length 7760.8
  TopLayer w6: IC19P.1@4937.15,8559.44 4936.34,8558.63 4914.93,8558.63 4908,8551.7 4908,8546.73 4920.53,8534.2 5090.42,8534.2 5110.42,8554.19 5110.42,8556.54 5113.32,8559.44 IC20P.5@5115.66,8559.44 ; IC20P.5@5124.15,8559.44 5134.98,8559.44 5145.95,8548.46 R132P.2@5176.13,8548.46 v1(5201.62,8548.46) ; v1(7188.16,8550.03) 7191.87,8550.03 7197.77,8555.93 7745.08,8555.93 7755.86,8555.93 7771.9,8571.97 7771.9,8625.66 7781.5,8635.26 7858.3,8635.26 7867.9,8625.66 7867.9,8508.06 7883.94,8492.02 7969.86,8492.02 7985.9,8508.06 7985.9,8546.33 7995.5,8555.93 8148.62,8555.93 8308.36,8555.93 8578.99,8826.56 10925.4,8826.56 11300.33,8451.63 11300.33,8416.2 11306.78,8409.76 11322.47,8394.07 11328.91,8387.62 11737.83,8387.62 11741.34,8384.11 11741.34,8379.14 11716.32,8354.11 11701.4,8354.11 J14.3@11690.65,8343.37
  BottomLayer w6: v1(5201.62,8548.46) 5213.2,8560.04 7178.15,8560.04 v1(7188.16,8550.03) ; J14.3@11690.65,8343.37 11695.94,8343.37 11740.23,8387.66 11888.87,8387.66 11894.24,8382.29 11895.03,8382.29 11903.45,8373.88 R65.2@11903.45,8373.09
LVDS0_P: IC19P.8 IC20P.6 J14.2 R64.2 R132P.1 | length 7800.8
  TopLayer w6: IC19P.8@4815.1,8559.44 v1(4866.6,8559.44) ; v1(5072.04,8579.96) 5123.32,8579.96 IC20P.6@5124.15,8579.13 5168.78,8579.13 5176.13,8586.47 R132P.1@5176.13,8585.47 v1(5202.63,8585.47) ; v1(7188.25,8583.02) 7204.35,8566.93 7745.08,8566.93 7751.3,8566.93 7760.9,8576.53 7760.9,8630.22 7776.94,8646.26 7862.86,8646.26 7878.9,8630.22 7878.9,8512.62 7888.5,8503.02 7965.3,8503.02 7974.9,8512.62 7974.9,8550.89 7990.94,8566.93 8148.62,8566.93 8303.8,8566.93 8571.22,8834.34 8574.44,8837.56 10929.95,8837.56 11311.33,8456.18 11311.33,8420.76 11333.47,8398.62 11746.06,8398.62 J14.2@11790.73,8443.29
  BottomLayer w6: v1(4866.6,8559.44) 4877.04,8569.88 5061.68,8569.88 5071.76,8579.96 v1(5072.04,8579.96) ; v1(5202.63,8585.47) 5216.25,8571.85 7177.08,8571.85 v1(7188.25,8583.02) ; J14.2@11790.65,8443.37 11786.67,8443.37 11750.45,8407.15 11750.45,8402.18 11753.97,8398.66 11889.65,8398.66 11894.24,8403.25 11895.03,8403.25 11903.45,8411.67 R64.2@11903.45,8412.46
LVDS1_N: IC19O.1 IC20O.5 J14.6 R67.2 R132O.2 | length 7725.8
  TopLayer w6: IC19O.1@4937.15,8283.85 4958.68,8283.85 4982,8260.54 5044.93,8260.54 5065.77,8281.38 5121.68,8281.38 5124.15,8283.85 5166.15,8283.85 5176.13,8273.87 R132O.2@5176.13,8272.87 v1@5201.62,8272.87 ; v1(7633.86,8395.67) 7637.56,8395.67 7645.44,8403.54 8089.57,8403.54 8100.92,8403.54 8117.44,8420.06 8117.44,8477.13 8127.04,8486.73 8203.84,8486.73 8213.44,8477.13 8213.44,8420.06 8229.96,8403.54 8309.06,8403.54 8371.48,8403.54 8567.35,8599.41 11095.11,8599.41 11250.89,8443.62 11250.89,8221.58 11285.54,8186.93 11723.32,8186.93 11747.05,8210.66 11747.05,8236.15 11753.67,8242.78 11768.37,8242.78 J14.6@11769.68,8244.09
  BottomLayer w6: v1(5202.13,8273.38) 5202.38,8273.38 5214.63,8285.63 7335.08,8285.63 7342.11,8292.66 7455.62,8406.17 7623.4,8406.17 v1(7633.86,8395.67) ; J14.6@11790.65,8243.37 11788.13,8240.85 11749.11,8240.85 11745.6,8244.36 11745.6,8275.12 11760.33,8289.86 11888.63,8289.86 11895.23,8283.27 11896.02,8283.27 11904.43,8274.85 R67.2@11904.43,8274.06
LVDS1_P: IC19O.8 IC20O.6 J14.5 R66.2 R132O.1 | length 7832.2
  TopLayer w6: IC19O.8@4815.1,8283.85 v1(4866.6,8283.85) ; v1(5071.28,8303.54) 5168.78,8303.54 5176.13,8310.88 R132O.1@5176.13,8309.88 v1(5202.63,8309.88) ; v1@7633.97,8428.67 7647.28,8415.35 8089.57,8415.35 8096.03,8415.35 8105.63,8424.95 8105.63,8482.02 8122.15,8498.54 8208.73,8498.54 8225.25,8482.02 8225.25,8424.95 8234.85,8415.35 8309.06,8415.35 8366.59,8415.35 8562.45,8611.22 8572.24,8611.22 11100,8611.22 11262.7,8448.52 11262.7,8226.47 11290.43,8198.74 11718.43,8198.74 11735.24,8215.55 11735.24,8235.86 11727.99,8243.11 J14.5@11710.63,8243.11
  BottomLayer w6: v1(4866.6,8283.85) 4868.91,8281.54 5049.28,8281.54 v1(5071.28,8303.54) ; v1(5202.63,8309.88) 5202.63,8309.63 5214.63,8297.63 7330.11,8297.63 7450.65,8418.17 7623.4,8418.17 v1(7633.95,8428.67) ; J14.5@11690.65,8243.37 11691.07,8243.78 11727.63,8243.78 11734.6,8250.75 11734.6,8279.68 11752.56,8297.64 11755.78,8300.86 11892.49,8300.86 11904.43,8312.81 R66.2@11904.43,8313.6
LVDS2_N: IC19N.1 IC20N.5 J14.9 R11.2 R132N.2 | length 7742.9
  TopLayer w6: IC19N.1@4937.15,8421.65 4937.15,8409.31 4948.13,8398.33 5116.83,8398.33 5124.15,8405.65 IC20N.5@5124.15,8421.65 5166.15,8421.65 5176.13,8411.67 R132N.2@5176.13,8410.67 v1(5201.62,8410.67) ; v1(7266.73,8413.39) 7270.44,8413.39 7278.31,8421.26 7332.68,8421.26 7487.2,8266.73 7747.05,8266.73 7758.4,8266.73 7773.92,8282.25 7773.92,8297.43 7782.52,8306.03 7851.32,8306.03 7859.92,8297.43 7859.92,8282.25 7875.44,8266.73 7944.88,8266.73 8428.15,8266.73 8712.6,8551.18 11087.39,8551.18 11200.97,8437.6 11200.97,8173.34 11286.71,8087.6 11734.67,8087.6 11738.19,8084.08 11738.19,8074.8 11706.75,8043.37 J14.9@11690.65,8043.37
  BottomLayer w6: v1(5201.62,8410.67) 5214.69,8423.73 7256.38,8423.73 v1(7266.73,8413.39) ; J14.9@11690.65,8043.37 11696.91,8043.37 11739.98,8086.44 11891.12,8086.44 11895.23,8082.34 11896.02,8082.34 11904.43,8073.92 R11.2@11904.43,8073.13
LVDS2_P: IC19N.8 IC20N.6 J14.8 R10.2 R132N.1 | length 7836
  TopLayer w6: IC19N.8@4815.1,8421.65 4855.16,8421.65 4862.44,8414.37 v1(4866.14,8414.37) ; v1(5071.28,8441.33) IC20N.6@5124.15,8441.33 5168.78,8441.33 5175.63,8448.18 R132N.1@5176.13,8447.68 v1(5202.63,8447.68) ; v1(7266.82,8446.38) 7280.16,8433.07 7337.57,8433.07 7492.1,8278.54 7747.05,8278.54 7753.51,8278.54 7762.11,8287.14 7762.11,8302.33 7777.63,8317.85 7856.21,8317.85 7871.73,8302.33 7871.73,8287.14 7880.33,8278.54 7944.88,8278.54 8423.26,8278.54 8707.71,8562.99 11092.28,8562.99 11212.78,8442.49 11212.78,8178.23 11291.61,8099.41 11733.93,8099.41 11742.13,8099.41 J14.8@11788.37,8145.65
  BottomLayer w6: v1(4866.14,8414.37) 5054.79,8414.37 5069.19,8428.77 5069.19,8439.24 v1(5071.28,8441.33) ; v1(5202.63,8447.68) 5214.57,8435.73 7256.17,8435.73 v1(7266.82,8446.38) ; J14.8@11790.65,8143.37 11786.08,8143.37 11748.64,8105.93 11748.64,8100.96 11752.16,8097.44 11889.65,8097.44 11895.23,8103.02 11896.02,8103.02 11904.43,8111.44 R10.2@11904.43,8112.23
LVDS3_N: IC19M.1 IC20M.5 J14.12 R13.2 R132M.2 | length 7767.9
  TopLayer w6: IC19M.1@4937.15,8146.06 4958.68,8146.06 4982,8122.74 5044.93,8122.74 5065.77,8143.58 5121.68,8143.58 IC20M.5@5124.15,8146.06 5166.15,8146.06 5176.13,8136.08 R132M.2@5176.13,8135.08 v1(5201.62,8135.08) ; v1(7250,8137.8) 7253.7,8137.8 7265.34,8149.43 7713.58,8149.43 7942.91,8149.43 8500.81,8149.43 8858.27,8506.89 11076.96,8506.89 11135.65,8448.2 11135.65,8140.13 11138.88,8136.91 11329.11,7946.68 11380.32,7895.46 11386.76,7889.02 11391.32,7889.02 11728.59,7889.02 11746.82,7907.25 11746.82,7931.36 11753.67,7938.21 11785.49,7938.21 J14.12@11790.65,7943.37
  BottomLayer w6: v1(5201.62,8135.08) 5214.69,8148.14 7239.65,8148.14 v1(7250,8137.8) ; J14.12@11797.24,7937.99 11752.15,7937.99 11745.62,7944.52 11745.62,7956.95 11745.62,7972.98 11760.88,7988.24 11889.95,7988.24 11895.23,7982.97 11896.02,7982.97 11904.43,7974.55 R13.2@11904.43,7973.76
LVDS3_P: IC19M.8 IC20M.6 J14.11 R12.2 R132M.1 | length 7853.8
  TopLayer w6: IC19M.8@4815.1,8146.06 v1(4866.6,8146.06) ; v1(5071.28,8165.74) IC20M.6@5124.15,8165.74 5168.78,8165.74 5176.13,8173.09 R132M.1@5176.13,8172.09 v1(5202.63,8172.09) ; v1(7250.09,8170.79) 7253.79,8170.79 7264.15,8160.43 8496.25,8160.43 8850.49,8514.67 8853.71,8517.89 11081.52,8517.89 11146.65,8452.76 11146.65,8144.69 11391.32,7900.02 11724.03,7900.02 11735.82,7911.81 11735.82,7931.16 11727.63,7939.35 11715.18,7939.35 J14.11@11711.61,7942.91
  BottomLayer w6: v1(4866.6,8146.06) 4868.91,8143.74 5049.28,8143.74 v1(5071.28,8165.74) ; v1(5202.63,8172.09) 5214.57,8160.14 7239.44,8160.14 v1(7250.09,8170.79) ; J14.11@11690.65,7943.37 11696.15,7937.87 11727.87,7937.87 11733.81,7943.8 11733.81,7952.06 11733.81,7977.87 11755.99,8000.06 11891.65,8000.06 11895.23,8003.64 11896.02,8003.64 11904.43,8012.05 R12.2@11904.43,8012.84
LVDS4_N: IC19L.1 IC20L.5 J14.15 R15.2 R132L.2 | length 7912.1
  TopLayer w6: IC19L.1@4937.15,7457.08 4958.68,7457.08 4982.69,7433.07 5073.82,7433.07 5097.83,7457.08 IC20L.5@5124.15,7457.08 5166.15,7457.08 5176.13,7447.1 R132L.2@5176.13,7446.1 5208,7446.1 5213.2,7451.3 v1(5213.84,7451.3) v1@5213.62,7451.08 ; v1(8816.72,7671.89) 8818.55,7671.89 8833.66,7687.01 11558.07,7687.01 11659.94,7788.88 11737.51,7788.88 11741.02,7785.36 11741.02,7780.39 11714.9,7754.27 11701.56,7754.27 J14.15@11690.65,7743.37
  BottomLayer w6: v1(5213.84,7451.3) 5213.84,7452.14 5224.2,7462.49 5649.05,7462.49 6600.39,7462.49 6611.88,7462.49 6628.51,7479.12 6628.51,7545.02 6638.11,7554.62 6714.91,7554.62 6724.51,7545.02 6724.51,7371.25 6741.14,7354.62 6827.88,7354.62 6844.51,7371.25 6844.51,7545.02 6854.11,7554.62 6930.91,7554.62 6940.51,7545.02 6940.51,7479.12 6957.14,7462.49 7035.43,7462.49 7912.3,7462.49 8132.7,7682.9 8805.71,7682.9 v1(8816.72,7671.89) ; J14.15@11690.65,7743.37 11690.65,7746.69 11733.52,7789.56 11733.52,7876.51 11755.44,7898.42 11891.05,7898.42 R15.2@11904.43,7911.8
LVDS4_P: IC19L.8 IC20L.6 J14.14 R14.2 R132L.1 | length 7995.3
  TopLayer w6: IC19L.8@4815.1,7457.08 v1(4894.38,7457.08) ; v1(5071.28,7476.76) IC20L.6@5124.15,7476.76 5168.78,7476.76 5176.13,7484.11 R132L.1@5176.13,7483.11 5178.7,7485.69 v1(5217.47,7485.69) ; v1(8816.8,7704.89) 8820.51,7704.89 8827.07,7698.33 11553.38,7698.33 11655.25,7800.2 11742.2,7800.2 11742.35,7800.04 11747.33,7800.04 J14.14@11790.65,7843.37
  BottomLayer w6: v1(4894.38,7457.08) 5067.77,7457.08 5071.28,7460.59 v1(5071.28,7476.76) ; v1(5217.47,7485.69) 5217.47,7484.85 5227.83,7474.49 5614.09,7474.49 5649.05,7474.49 6600.39,7474.49 6606.91,7474.49 6616.51,7484.09 6616.51,7549.99 6633.14,7566.62 6719.88,7566.62 6736.51,7549.99 6736.51,7376.22 6746.11,7366.62 6822.91,7366.62 6832.51,7376.22 6832.51,7549.99 6849.14,7566.62 6935.88,7566.62 6952.51,7549.99 6952.51,7484.09 6962.11,7474.49 7035.43,7474.49 7907.33,7474.49 8126.73,7693.9 8127.65,7693.9 8128,7694.25 8806.16,7694.25 v1(8816.8,7704.89) ; J14.14@11790.65,7843.37 11790.65,7836.51 11753.01,7798.86 11748.04,7798.86 11744.52,7802.38 11744.52,7871.95 11759.99,7887.42 11888.85,7887.42 R14.2@11903.25,7873.02
LVDS5_N: IC19K.1 IC20K.5 J14.18 R17.2 R132K.2 | length 7807.6
  TopLayer w6: IC19K.1@4937.15,7181.49 4958.68,7181.49 4982,7158.17 5044.93,7158.17 5065.77,7179.02 5121.68,7179.02 IC20K.5@5124.15,7181.49 5166.15,7181.49 5176.13,7171.51 R132K.2@5176.13,7170.51 v1@5201.62,7170.51 ; v1(8669.69,7281.3) 8669.69,7282.88 8679.13,7292.32 10223.43,7292.32 10316.93,7385.83 11232.28,7385.83 11437.82,7591.36 11738.68,7591.36 11747.22,7599.91 11747.22,7632.64 11750.74,7636.15 11783.44,7636.15 J14.18@11790.65,7643.37
  BottomLayer w6: v1(5202.13,7171.02) 5214.69,7183.58 6987.2,7183.58 6998.69,7183.58 7015.32,7200.21 7015.32,7241.57 7024.92,7251.17 7101.72,7251.17 7111.32,7241.57 7111.32,7200.21 7127.95,7183.58 7273.1,7183.58 7322.33,7183.58 7778.3,6727.6 7781.82,6724.09 8021.33,6724.09 8024.85,6727.6 8589.38,7292.13 8658.85,7292.13 v1(8669.69,7281.3) ; J14.18@11767.09,7640.6 11767.09,7641.72 11764.33,7644.48 11751.04,7644.48 11747.53,7648 11747.53,7677.65 11757.5,7687.62 11890.1,7687.62 11895.23,7682.49 11896.02,7682.49 11904.43,7674.08 R17.2@11904.43,7673.29
LVDS5_P: IC19K.8 IC20K.6 J14.17 R16.2 R132K.1 | length 7983.9
  TopLayer w6: IC19K.8@4815.1,7181.49 4870.68,7181.49 4902.56,7149.61 v1(4906.5,7149.61) ; v1(5071.28,7201.17) IC20K.6@5124.15,7201.17 5168.78,7201.17 5176.13,7208.52 R132K.1@5176.13,7207.52 v1(5202.63,7207.52) ; v1(8669.78,7314.29) 8673.48,7314.29 8684.45,7303.32 10218.87,7303.32 10312.37,7396.83 11227.73,7396.83 11433.26,7602.36 11734.12,7602.36 11736.22,7604.46 11736.22,7631.62 11732.71,7635.13 11698.88,7635.13 J14.17@11690.65,7643.37
  BottomLayer w6: v1(4906.5,7149.61) 4917.91,7161.02 5026.48,7161.02 5029.32,7158.17 5050.28,7158.17 5071.28,7179.17 v1(5071.28,7201.17) ; v1(5202.63,7207.52) 5214.57,7195.58 6987.2,7195.58 6993.72,7195.58 7003.32,7205.18 7003.32,7246.54 7019.95,7263.17 7106.69,7263.17 7123.32,7246.54 7123.32,7205.18 7132.92,7195.58 7273.1,7195.58 7327.3,7195.58 7786.79,6736.09 8016.36,6736.09 8584.41,7304.13 8659.62,7304.13 v1(8669.78,7314.29) ; J14.17@11690.65,7643.37 11731.64,7643.37 11736.53,7648.26 11736.53,7682.2 11739.75,7685.42 11752.94,7698.62 11890.39,7698.62 11895.23,7703.45 11896.02,7703.45 11904.43,7711.87 R16.2@11904.43,7712.66
LVDS6_N: IC19J.1 IC20J.5 J14.21 R19.2 R132J.2 | length 7773.6
  TopLayer w6: IC19J.1@4937.15,7319.28 4958.68,7319.28 4982,7295.97 5044.93,7295.97 5065.77,7316.81 5121.68,7316.81 IC20J.5@5124.15,7319.28 5166.15,7319.28 5176.13,7309.31 R132J.2@5176.13,7308.31 v1(5208.69,7308.31) ; v1(7928.14,6782.2) 7931.84,6782.2 7941.97,6792.32 8299.21,6792.32 8650.42,7143.53 10741.95,7143.53 10748.4,7149.97 10784.45,7186.02 11265.75,7186.02 11565.94,7486.22 11734.97,7486.22 11738.48,7482.71 11738.48,7477.74 11704.11,7443.37 J14.21@11690.65,7443.37
  BottomLayer w6: v1(5208.69,7308.31) 5208.69,7311.34 5209.46,7311.34 5218.4,7320.28 6343.5,7320.28 6354.99,7320.28 6371.62,7336.91 6371.62,7386.46 6381.22,7396.06 6458.02,7396.06 6467.62,7386.46 6467.62,7336.91 6484.25,7320.28 6581.69,7320.28 7285.04,7320.28 7812.01,6793.31 7917.03,6793.31 v1(7928.14,6782.2) ; J14.21@11690.65,7443.37 11704.11,7443.37 11746.97,7486.22 11891.69,7486.22 11895.23,7482.69 11896.02,7482.69 11904.43,7474.27 R19.2@11904.43,7473.48
LVDS6_P: IC19J.8 IC20J.6 J14.20 R18.2 R132J.1 | length 7893
  TopLayer w6: IC19J.8@4815.1,7319.28 v1(4866.6,7319.28) ; v1(5071.28,7338.97) IC20J.6@5124.15,7338.97 5168.78,7338.97 5175.63,7345.82 R132J.1@5176.13,7345.32 v1(5202.63,7345.32) ; v1(7928.23,6815.2) 7931.93,6815.2 7942.99,6804.13 8294.32,6804.13 8642.88,7152.69 8644.02,7152.69 8645.86,7154.53 10737.4,7154.53 10779.89,7197.02 11261.19,7197.02 11561.39,7497.22 11744.51,7497.22 J14.20@11790.65,7543.37
  BottomLayer w6: v1(4866.6,7319.28) 4868.13,7320.81 4890.13,7298.81 5053.13,7298.81 5071.28,7316.97 v1(5071.28,7338.97) ; v1(5202.63,7345.32) 5205.66,7345.32 5218.7,7332.28 6343.5,7332.28 6350.02,7332.28 6359.62,7341.88 6359.62,7391.43 6376.25,7408.06 6462.99,7408.06 6479.62,7391.43 6479.62,7341.88 6489.22,7332.28 6581.69,7332.28 7290.01,7332.28 7816.98,6805.31 7918.34,6805.31 v1(7928.23,6815.2) ; J14.20@11790.65,7543.37 11753.8,7506.52 11753.8,7501.55 11757.32,7498.03 11889.61,7498.03 11895.23,7503.65 11896.02,7503.65 11904.43,7512.06 R18.2@11904.43,7512.85
LVDS7_N: IC19I.1 IC20I.5 J14.24 R21.2 R132I.2 | length 7900.1
  TopLayer w6: IC19I.1@4937.15,7043.69 4958.68,7043.69 4982,7020.38 5044.93,7020.38 5065.77,7041.22 5121.68,7041.22 IC20I.5@5124.15,7043.69 5166.15,7043.69 5176.13,7033.72 R132I.2@5176.13,7032.72 v1@5201.62,7032.72 ; v1(5201.62,7038.62) v1@5204,7041 ; v1@11262.75,7081.18 11273.75,7092.18 11305.46,7092.18 11503.64,7290.35 11717.69,7290.35 11745.25,7317.91 11745.25,7330.88 11750,7335.63 11782.92,7335.63 J14.24@11790.65,7343.37
  BottomLayer w6: v1(5201.62,7038.62) 5202.43,7038.62 5211.98,7048.17 6283.3,7048.17 6472.66,7048.17 6482.26,7038.57 6482.26,7004.7 6498.89,6988.07 6585.63,6988.07 6602.26,7004.7 6602.26,7103.41 6611.86,7113.01 6688.66,7113.01 6698.26,7103.41 6698.26,7004.25 6714.89,6987.63 6801.63,6987.63 6818.26,7004.25 6818.26,7038.57 6827.86,7048.17 6834.38,7048.17 7226.43,7048.17 7628.56,6646.04 7632.08,6642.53 8486.03,6642.53 8489.55,6646.04 8713.58,6870.08 9567.67,6870.08 10432.75,6870.08 10655.19,7092.52 11251.36,7092.52 v1(11262.71,7081.18) ; J14.24@11766.46,7335.63 11750,7335.63 11744.09,7341.54 11744.09,7374.02 11757.95,7387.88 11889.65,7387.88 11895.23,7382.3 11896.02,7382.3 11904.43,7373.88 R21.2@11904.43,7373.09
LVDS7_P: IC19I.8 IC20I.6 J14.23 R20.2 R132I.1 | length 8035.3
  TopLayer w6: IC19I.8@4815.1,7043.69 v1(4866.6,7043.69) ; v1(5071.28,7063.38) IC20I.6@5124.15,7063.38 5168.78,7063.38 5176.13,7070.72 R132I.1@5176.13,7069.72 v1(5202.63,7069.72) ; v1@11262.8,7114.13 11273.75,7103.18 11300.9,7103.18 11499.08,7301.35 11713.14,7301.35 11734.25,7322.47 11734.25,7331.69 11729.33,7336.61 11697.4,7336.61 J14.23@11690.65,7343.37
  BottomLayer w6: v1(4866.6,7043.69) 4868.13,7045.22 4890.13,7023.22 5026.48,7023.22 5029.32,7020.38 5050.28,7020.38 5071.28,7041.38 v1(5071.28,7063.38) ; v1(5202.63,7069.72) 5203.44,7069.72 5212.99,7060.17 6283.3,7060.17 6477.63,7060.17 6494.26,7043.54 6494.26,7009.67 6503.86,7000.07 6580.66,7000.07 6590.26,7009.67 6590.26,7108.38 6606.89,7125.01 6693.63,7125.01 6710.26,7108.38 6710.26,7009.23 6719.86,6999.63 6796.66,6999.63 6806.26,7009.23 6806.26,7043.54 6822.89,7060.17 6834.38,7060.17 7231.4,7060.17 7637.05,6654.53 8481.06,6654.53 8705.1,6878.56 8706.51,6878.56 8709.03,6881.08 9572.22,6881.08 10428.19,6881.08 10647.41,7100.3 10650.63,7103.52 11252.14,7103.52 v1(11262.8,7114.17) ; J14.23@11713.37,7336.61 11729.33,7336.61 11733.09,7340.38 11733.09,7378.57 11753.4,7398.88 11890.42,7398.88 11895.23,7403.69 11896.02,7403.69 11904.43,7412.11 R20.2@11904.43,7412.89
LVDS8_N: IC19H.1 IC20H.5 J24.3 R23.2 R132H.2 | length 7726.6
  TopLayer w6: IC19H.1@4937.15,8008.26 4958.68,8008.26 4982,7984.94 5044.93,7984.94 5065.77,8005.79 5121.68,8005.79 IC20H.5@5124.15,8008.26 5166.15,8008.26 5176.13,7998.28 R132H.2@5176.13,7997.28 5201.62,7997.28 v1(5205.34,8001) ; v1(7175.2,8001.97) 7178.9,8001.97 7188.74,8011.81 7437.99,8011.81 7450.74,8011.81 7468.41,8029.48 7468.41,8098.27 7478.01,8107.87 7554.81,8107.87 7564.41,8098.27 7564.41,7925.55 7582.08,7907.87 7670.3,7907.87 7687.97,7925.55 7687.97,8098.27 7697.57,8107.87 7774.37,8107.87 7783.97,8098.27 7783.97,7925.55 7801.64,7907.87 7889.85,7907.87 7907.53,7925.55 7907.53,8098.27 7917.13,8107.87 7993.93,8107.87 8003.53,8098.27 8003.53,7925.55 8021.2,7907.87 8109.41,7907.87 8127.09,7925.55 8127.09,8051.7 8136.69,8061.3 8213.49,8061.3 8223.09,8051.7 8223.09,8029.48 8240.76,8011.81 8318.78,8011.81 8493.11,8011.81 8868.11,8386.81 10991.56,8386.81 10995.08,8383.3 10995.08,8375 10963.41,8343.33 J24.3@10951.68,8343.33
  BottomLayer w6: v1(5205.34,8001) 5209.01,8001 5220.38,8012.37 7164.8,8012.37 v1(7175.2,8001.97) ; J24.3@10951.68,8343.33 10956.88,8343.33 11001,8387.45 11150.11,8387.45 11154.79,8382.76 11155.58,8382.76 11164,8374.35 R23.2@11164,8373.56
LVDS8_P: IC19H.8 IC20H.6 J24.2 R22.2 R132H.1 | length 7874.7
  TopLayer w6: IC19H.8@4815.1,8008.26 v1(4866.6,8008.26) ; v1(5071.28,8027.94) IC20H.6@5124.15,8027.94 5168.78,8027.94 5175.63,8034.79 R132H.1@5176.13,8034.29 v1(5202.63,8034.29) ; v1(7175.28,8034.96) 7178.99,8034.96 7188.36,8025.59 7437.99,8025.59 7445.03,8025.59 7454.63,8035.19 7454.63,8103.98 7472.3,8121.65 7560.52,8121.65 7578.19,8103.98 7578.19,7931.25 7587.79,7921.65 7664.59,7921.65 7674.19,7931.25 7674.19,8103.98 7691.86,8121.65 7780.07,8121.65 7797.75,8103.98 7797.75,7931.25 7807.35,7921.65 7884.15,7921.65 7893.75,7931.25 7893.75,8103.98 7911.42,8121.65 7999.63,8121.65 8017.31,8103.98 8017.31,7931.25 8026.91,7921.65 8103.71,7921.65 8113.31,7931.25 8113.31,8057.4 8130.98,8075.08 8219.19,8075.08 8236.87,8057.4 8236.87,8035.19 8246.47,8025.59 8318.78,8025.59 8487.4,8025.59 8858.37,8396.55 ; 8860.26,8398.45 11006.8,8398.45 11043.72,8435.37 11043.72,8443.33 J24.2@11051.68,8443.33
  BottomLayer w6: v1(4866.6,8008.26) 4868.13,8009.79 4890.13,7987.79 5026.48,7987.79 5029.32,7984.94 5050.28,7984.94 5071.28,8005.94 v1(5071.28,8027.94) ; v1(5202.63,8034.29) 5203.06,8034.29 5212.99,8024.37 7164.69,8024.37 v1(7175.28,8034.96) ; J24.2@11051.68,8443.33 11037.69,8443.33 11003.46,8409.1 11003.46,8404.13 11006.98,8400.61 11151.68,8400.61 11154.79,8403.72 11155.58,8403.72 11164,8412.14 R22.2@11164,8412.93
LVDS9_N: IC19G.1 IC20G.5 J24.6 R25.2 R132G.2 | length 7811.3
  TopLayer w6: IC19G.1@4937.15,7732.67 4958.68,7732.67 4982,7709.35 5044.93,7709.35 5065.77,7730.2 5121.68,7730.2 IC20G.5@5124.15,7732.67 5166.15,7732.67 5176.13,7722.69 R132G.2@5176.13,7721.69 v1(5204.69,7721.69) ; v1(7630.59,7769.45) 7634.29,7769.45 7641.42,7776.57 8360.24,7776.57 8772.46,8188.8 10986.05,8188.8 11008.05,8210.8 11008.05,8239.81 11011.56,8243.33 J24.6@11051.68,8243.33
  BottomLayer w6: v1@5204.72,7722.2 5204.72,7722.75 5216.16,7734.2 6463.09,7734.2 6474.57,7734.2 6491.2,7750.83 6491.2,7821.31 6500.8,7830.91 6577.6,7830.91 6587.2,7821.31 6587.2,7660.76 6603.83,7644.13 6690.57,7644.13 6707.2,7660.76 6707.2,7821.31 6716.8,7830.91 6793.6,7830.91 6803.2,7821.31 6803.2,7660.76 6819.83,7644.13 6906.57,7644.13 6923.2,7660.76 6923.2,7821.31 6932.8,7830.91 7009.6,7830.91 7019.2,7821.31 7019.2,7660.76 7035.83,7644.13 7122.57,7644.13 7139.2,7660.76 7139.2,7812.81 7148.8,7822.41 7225.6,7822.41 7235.2,7812.81 7235.2,7750.83 7251.83,7734.2 7310.04,7734.2 7461.8,7734.2 7468.83,7741.23 7507.55,7779.95 7620.13,7779.95 v1(7630.59,7769.45) ; J24.6@11051.68,8243.33 11048.06,8239.71 11008.03,8239.71 11004.51,8243.23 11004.51,8281.09 11009.67,8286.24 11152.06,8286.24 11155.69,8282.62 11156.47,8282.62 11164.89,8274.2 R25.2@11164.89,8273.41